# Altium PCB Mic_Amplifier.PcbDoc
Units mm, origin at the board's own origin, x right, y up, seen from the top; angles counter-clockwise.
Board outline 45 x 30 mm, 2 copper layers (Top Layer, Bottom Layer); 43 components, 24 nets, 114 pads, 61 vias.
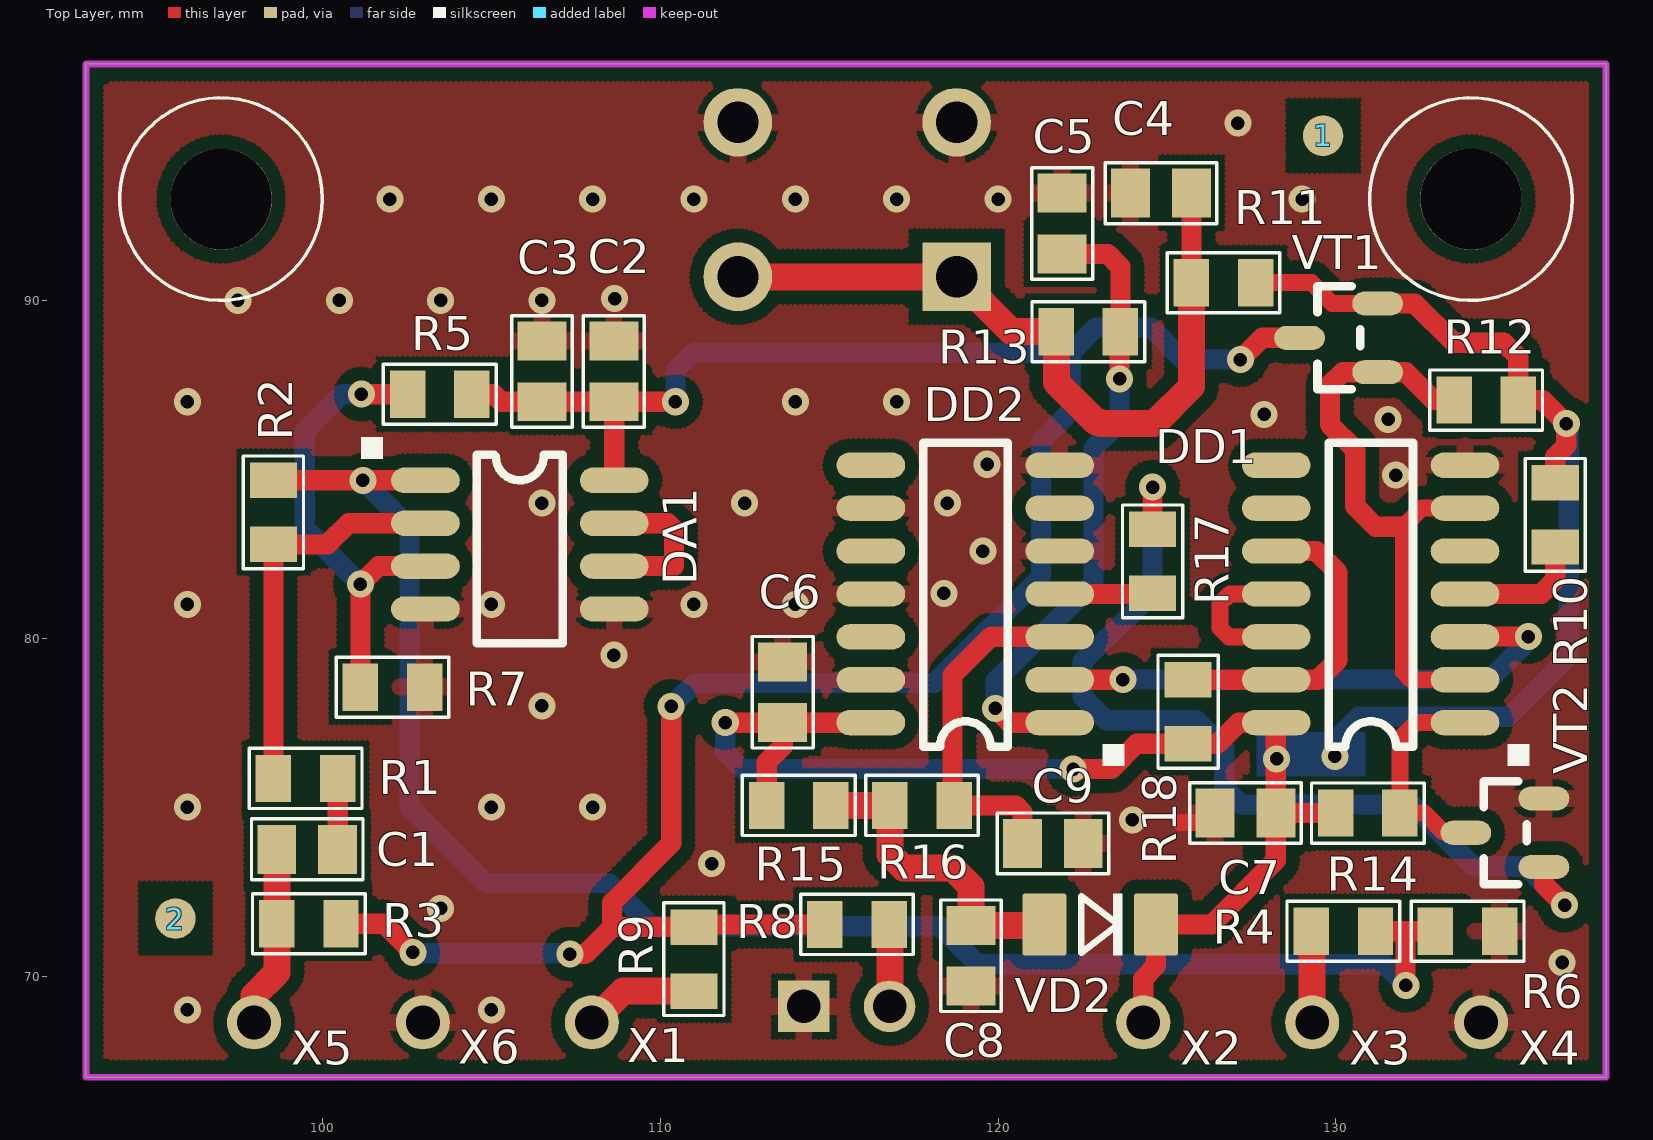
[diagram p0: Top Layer view]
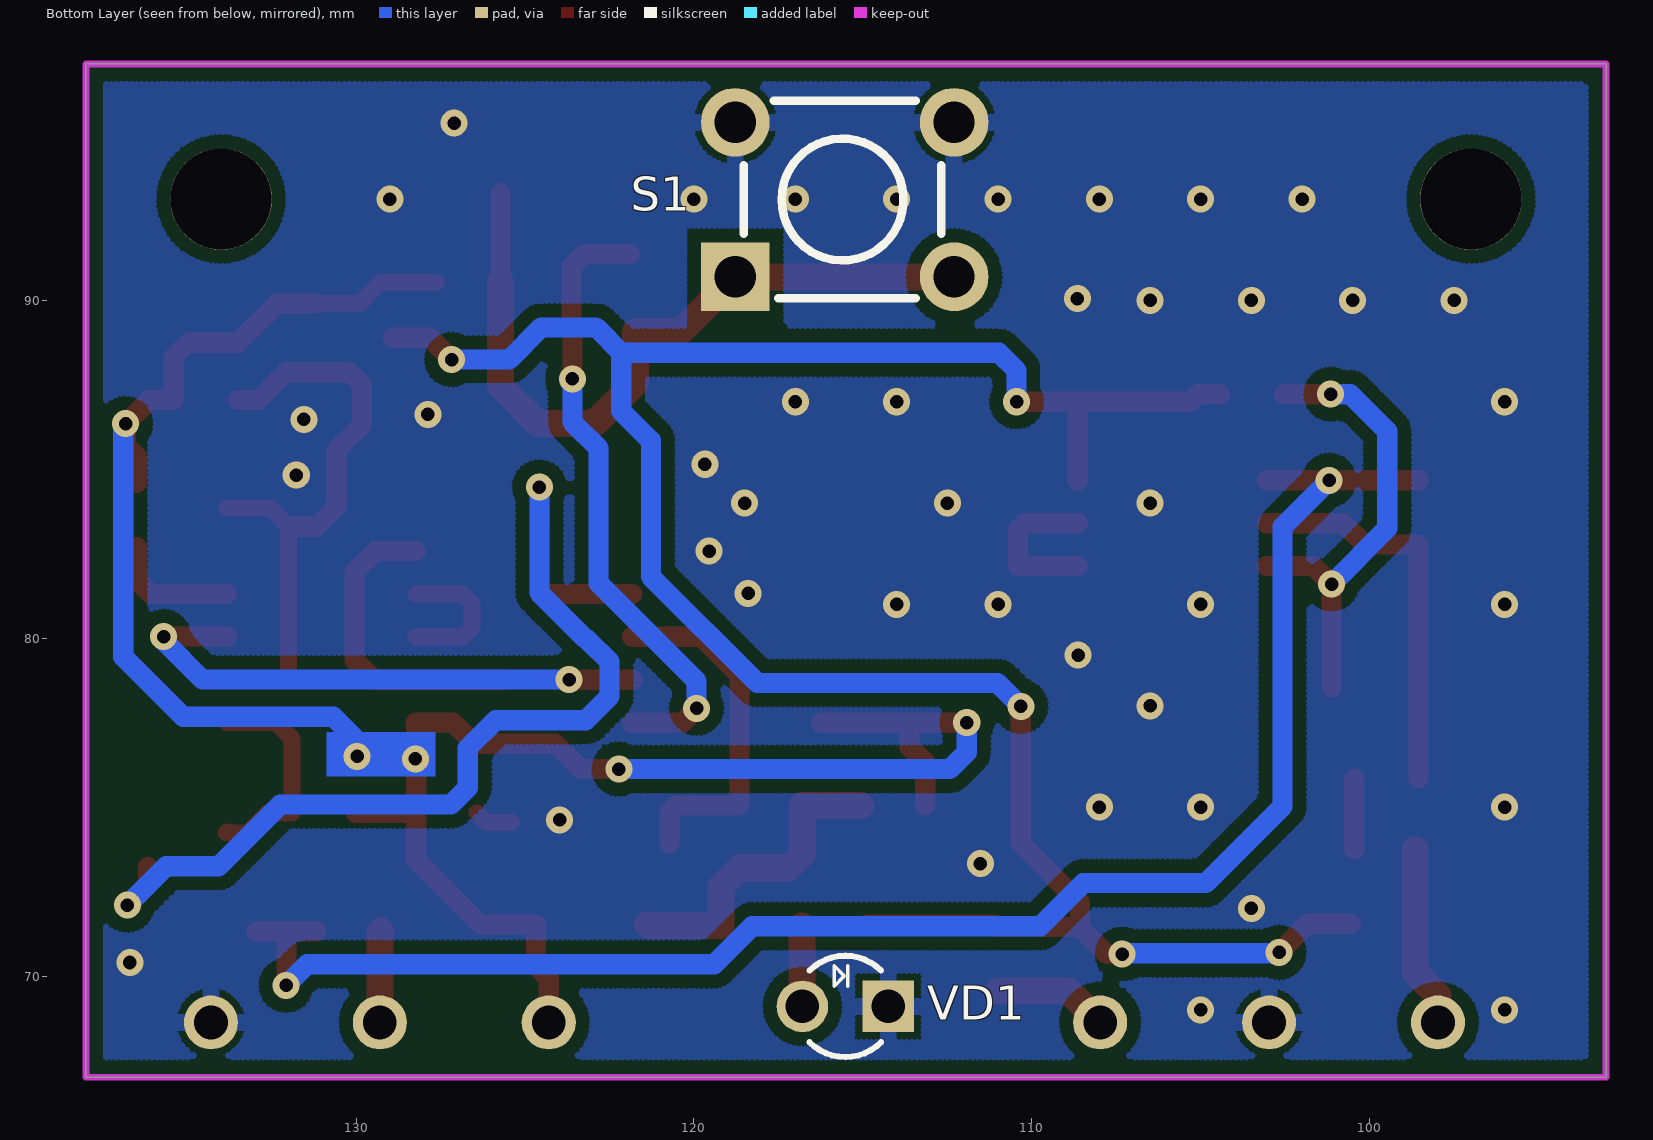
[diagram p1: Bottom Layer view, seen from below]

## Layer stack, top to bottom
Top Solder: solder mask 0.0102, Solder Resist, Dk 3.5
Top Layer: signal copper 0.0356
Dielectric 1: dielectric 0.32, FR-4, Dk 4.8
Bottom Layer: signal copper 0.0356
Bottom Solder: solder mask 0.0102, Solder Resist, Dk 3.5

## Board outline
93,67 138,67 138,97 93,97

## Design rules (kind name [scope] priority, off if disabled: settings)
Clearance [All] p1: gap=0.4
ComponentClearance [All] p1: gap=0.2 collisioncheckmode=3 verticalgap=2540 showdistances=FALSE
PolygonConnect PolygonConnect_1 [IsVia] p1: connectstyle=Direct reliefconductorwidth=0.254 reliefentries=4 polygonreliefangle="90 Angle" airgapwidth=0.254
PolygonConnect [All] p2: connectstyle=Relief reliefconductorwidth=0.5 reliefentries=4 polygonreliefangle="90 Angle" airgapwidth=0.2
RoutingVias [All] p1: holewidth=0.711 width=1.27 viastyle="Through Hole" minholewidth=0.711 minwidth=1.27 maxholewidth=0.711 maxwidth=1.27 useviatemplates=TRUE viatemplateguid#1={59668F55-10FF-42C5-ADF5-3CE09D6D3DFD} viatemplatename#1=v80h40m-20
SilkToSolderMaskClearance [IsPad] p1: minsilkscreentomaskgap=0.2 clearancetoexposedcopper=TRUE
SolderMaskExpansion [All] p1: expansion=0.102
Width [All] p1: maxlimit=3 minlimit=0.2 preferedwidth=0.5
28 further rules are at their usual default settings.

## Classes and differential pairs
component class Main: 1 2 C1 C2 C3 DA1 R1 R2 R3 R4 R5 R6 R7 R8 R9 S1 VD1 X1 X2 X3 X4 X5 X6
component class ON_OFF: C4 C5 C6 C7 C8 C9 DD1 DD2 R10 R11 R12 R13 R14 R15 R16 R17 R18 VD2 VT1 VT2

## Components (designator, comment, footprint, x,y, rotation, side; value= is the part's Value field where it differs from the comment)
1 "REPER1.2" REPER1.2 129.625,94.875 r90 top
2 "REPER1.2" REPER1.2 95.65,71.7 r90 top
C1 "0.1uF" CC0805 99.55,73.75 r0 top
C2 "0.1uF" CC0805 108.625,87.9 r270 top
C3 "10uFx16V" CC0805 106.5,87.9 r270 top
C4 "10uFx16V" CC0805 124.825,93.175 r0 top
C5 "1nF" CC0805 121.9,92.275 r270 top
C6 "0.1uF" CC0805 113.625,78.4 r270 top
C7 "0.1uF" CC0805 127.325,74.825 r0 top
C8 "10uFx16V" CC0805 119.2,70.6 r90 top
C9 "1nF" CC0805 121.625,73.925 r180 top
DA1 "LM358D" SO-8 103.05,84.675 r270 top
DD1 "74HC74D" SO14 133.825,77.5 r90 top
DD2 "SN74HC14D" SO14 121.825,77.5 r90 top
R1 "16k" RC0805 99.5,75.85 r0 top
R2 "1M" RC0805 98.55,83.725 r270 top
R3 "12k" RC0805 99.6,71.55 r0 top
R4 "100E" RC0805 130.225,71.325 r0 top
R5 "12k" RC0805 103.475,87.225 r0 top
R6 "1k2" RC0805 133.9,71.325 r0 top
R7 "12k" RC0805 102.075,78.55 r180 top
R8 "560E" RC0805 115.825,71.525 r180 top
R9 "560E" RC0805 111,70.5 r90 top
R10 "10k" RC0805 136.5,83.65 r90 top
R11 "10k" RC0805 126.675,90.525 r0 top
R12 "10k" RC0805 134.45,87.05 r0 top
R13 "10k" RC0805 122.675,89.075 r0 top
R14 "10k" RC0805 130.95,74.825 r180 top
R15 "220k" RC0805 114.1,75.05 r180 top
R16 "10k" RC0805 117.75,75.05 r0 top
R17 "10k" RC0805 124.575,82.275 r90 top
R18 "10k" RC0805 125.625,77.825 r270 top
S1 "SWT-2/5" 7906H-1 118.777,90.7 r180 bottom
VD1 "LED_3" LED3 114.25,69.1 r0 bottom
VD2 "LL4148" SOD-80 123.025,71.525 r180 top
VT1 "IRLML6302" SOT-23(123) 131.25,87.875 r0 top
VT2 "BC817" SOT-23(123) 136.175,73.225 r0 top
X1 "PIN_1mm" PIN_1mm 107.975,68.625 r0 top
X2 "PIN_1mm" PIN_1mm 124.3,68.625 r0 top
X3 "PIN_1mm" PIN_1mm 129.3,68.625 r0 top
X4 "PIN_1mm" PIN_1mm 134.3,68.625 r0 top
X5 "PIN_1mm" PIN_1mm 97.975,68.625 r0 top
X6 "PIN_1mm" PIN_1mm 102.975,68.625 r0 top

## Footprints (in the part's own frame and the unit in brackets; to place one, negate y for a bottom-side part, rotate by r counter-clockwise, add the part's x,y. Pads: shape width x height; smd on the part's side, far side on the other; paste and mask are expansions set on the pad)
7906H-1 [mil]
  rect 80x80 hole 48: 1(0,0)
  round 80 hole 48: 2(255,0) 3(0,180) 4(255,180)
  silkscreen extent 10,-25 240,205
CC0805 [mm]
  rect 1.15x1.45 smd paste-25.4: 1(-0.9,0) 2(0.9,0)
  silkscreen extent -1.65,-0.9 1.65,0.9
LED3 [mil]
  rect 60x60 hole 39: 1(0,0)
  round 60 hole 39: 2(100,0)
  silkscreen extent 8,-59 92,59
PIN_1mm [mm]
  round 1.6 hole 1: 1(0,0)
RC0805 [mm]
  rect 1.05x1.4 smd paste-25.4: 1(-0.95,0) 2(0.95,0)
  silkscreen extent -1.67,-0.89 1.67,0.89
REPER1.2 [mm]
  round 1.2 smd paste-25.4 mask-25.4: 1(0,0)
  Top Layer pour cut-out: -1.2,-1.2 1.2,-1.2 1.2,1.2 -1.2,1.2
SO14 [mil]
  oval 29.53x80 smd: 1(0,0) 2(50,0) 3(100,0) 4(150,0) 5(200,0) 6(250,0) 7(300,0) 8(300,220) 9(250,220) 10(200,220) 11(150,220) 12(100,220) 13(50,220) 14(0,220)
  silkscreen extent -50,-75 326,159
SO-8 [mil]
  oval 29.53x80 smd: 1(0,0) 2(50,0) 3(100,0) 4(150,0) 5(150,220) 6(100,220) 7(50,220) 8(0,220)
  silkscreen extent -50,-75 190,160
SOD-80 [mm]
  rrect10% 1.3x1.83 smd paste-25.4: 1(1.651,0) 2(-1.651,0)
  silkscreen extent -0.66,-0.91 0.56,0.91
SOT-23(123) [mil]
  oval 59.06x28.07 smd: 1(-0.5,0) 2(-0.5,80) 3(-91.5,40)
  silkscreen extent -70,-20 -20,100

## Part data
C1 C2 C3 C4 C5 C6 C7 C8 C9: library part CC0805, "CC0805"
DD2: "Hex Schmitt-Trigger INVERTERS"
R1 R2 R3 R4 R5 R6 R7 R8 R9 R10 R11 R12 R13 R14 R15 R16 R17 R18: library part RC0805, "RC0805"
S1: "Switch, Single Pole, Single Throw, Normally Open"
VT1: library part IRLML6402, "HEXFET Power MOSFET"
VT2: library part BC846BLT1, "BC846BLT1"

## Free pads (board coordinates)
  round 3 hole 3: 0(97,93) 0(134,93)

## Via types
v1: diameter 0.8, hole 0.4, Top Layer to Bottom Layer, 61 vias

## Nets (pads, with @x,y where several pads share a name; then routed paths per layer and width w, separated by ;. In a path a pad name is that pad's centre, name@x,y a point inside that pad or via, vN(x,y) a via of type N, cw(c..) or ccw(c..) an arc to the next point about the centre after c; other vN are vias at no path point)
GND: C2.1 C3.1 C4.1 C5.1 C6.1 C7.1 C8.1 C9.1 DA1.4 DA1.5 DD1.7 DD2.5 DD2.7 DD2.9 DD2.11 DD2.13 R6.2 R7.1 S1.3 S1.4 VD1.1 VT2.2 X4.1 X6.1 | length 1.1
  Top Layer w0.5: 125.4,74.55 126.15,74.55 C7.1
  other v1: 96,69 105,69 136.7,70.4 103.5,72 111.525,73.325 123.975,74.625 96,75 105,75 108,75 106.5,78 108.625,79.5 96,81 105,81 111,81 114,81 118.4,81.325 119.55,82.575 106.5,84 112.5,84 118.5,84 131.775,84.825 119.675,85.15 131.55,86.475 127.875,86.625 96,87 114,87 117,87 97.5,90 100.5,90 103.5,90 106.5,90 108.65,90.05 102,93 105,93 108,93 111,93 114,93 117,93 120,93 129,93 127.1,95.25
MIC_IN: C1.1 R3.1 X5.1 | length 5.4
  Top Layer w0.8: X5.1 97.975,69.425 98.65,70.1 R3.1 C1.1
NetC1_2: C1.2 R1.2 | length 2.1
  Top Layer w0.6: C1.2 R1.2
NetC4_2: C4.2 R11.1 R13.1 S1.1 S1.2 | length 22.8
  Top Layer w0.6: R11.1 C4.2
  Top Layer w0.8: S1.2 S1.1 120.402,89.075 R13.1 121.725,87.575 122.905,86.395 122.994,86.395 123.039,86.35 124.625,86.35 125.725,87.45 R11.1
  Bottom Layer w0.6: S1.1 S1.1@119.152,90.325
NetC5_2: C5.2 DD2.1 R13.2 | length 18.6
  Top Layer w0.6: v1(119.925,77.925) 120.35,77.5 DD2.1 ; C5.2 123.25,91.375 123.625,91 R13.2 123.6,89.05 v1(123.6,87.675)
  Bottom Layer w0.6: v1(119.925,77.925) 119.925,78.725 122.825,81.625 122.825,85.625 123.6,86.4 v1(123.6,87.675)
NetC8_2: C8.2 R15.1 R16.1 VD2.1 | length 9.3
  Top Layer w0.8: R15.1 R16.1 116.8,73.6 117.2,73.2 118.65,73.2 119.2,72.65 C8.2 121.349,71.5 VD2.1
NetC9_2: C9.2 DD2.3 R16.2 | length 10.6
  Top Layer w0.6: C9.2 120.725,74.85 120.525,75.05 R16.2 118.65,75.1 118.65,78.9 119.79,80.04 DD2.3
NetDA1_1: DA1.1 R2.1 R4.2 R6.1 | length 49.8
  Top Layer w0.6: R2.1 v1(101.2,84.675) DA1.1 ; R4.2 132.062,71.325 ; v1(132.075,69.725) 132.062,69.738 132.062,71.325 ; R6.1 132.062,71.325
  Bottom Layer w0.6: v1(101.2,84.675) 102.575,83.3 102.575,75.025 104.85,72.75 108.475,72.75 109.75,71.475 118.275,71.475 119.4,70.35 131.45,70.35 v1(132.075,69.725)
NetDA1_2: DA1.2 R1.1 R2.2 | length 11.7
  Top Layer w0.6: R1.1 R2.2 100.15,82.775 100.78,83.405 DA1.2
NetDA1_3: DA1.3 R5.1 R7.2 | length 13.9
  Top Layer w0.6: R7.2 v1(101.125,81.6) 101.66,82.135 DA1.3 ; v1(101.15,87.225) R5.1
  Bottom Layer w0.6: v1(101.125,81.6) 99.475,83.25 99.475,86.125 100.575,87.225 v1(101.15,87.225)
NetDA1_6: DA1.6 DA1.7 | length 4.7
  Top Layer w0.6: DA1.6 110.41,82.135 110.41,83.215 110.22,83.405 DA1.7
NetDD1_1: DD1.1 R14.1 VT2.3 | length 6.6
  Top Layer w0.5: VT2.3@133.825,74.267 VT2.3 133.209,74.241 132.625,74.825 R14.1 131.9,77.025 132.375,77.5 DD1.1
NetDD1_2: DD1.2 DD1.6 R12.1 VT1.1 | length 18
  Top Layer w0.5: DD1.2 132.23,78.77 132,79 132,83.3 132.55,83.85 DD1.6
  Top Layer w0.6: 132,83.3 131.175,83.3 130.575,83.9 130.575,85.575 129.825,86.325 129.825,87.5 130.2,87.875 VT1.1 132.075,87.875 132.9,87.05 R12.1
NetDD1_3: DD1.3 DD2.2 | length 16.4
  Top Layer w0.6: DD2.2 123.695,78.77 v1(123.7,78.775) ; DD1.3 133.835,80.05 v1(135.7,80.05)
  Bottom Layer w0.6: v1(123.7,78.775) 134.55,78.775 135.7,79.925 v1(135.7,80.05)
NetDD1_4: DD1.4 R10.1 | length 3.8
  Top Layer w0.6: DD1.4 136.085,81.31 136.5,81.725 R10.1
NetDD1_10: DD1.10 DD1.13 R18.1 | length 9.3
  Top Layer w0.6: R18.1 125.63,78.77 DD1.13 129.47,78.77 130.053,79.353 130.053,81.947 129.42,82.58 DD1.10
NetDD1_11: DD1.11 DD1.12 | length 4.3
  Top Layer w0.5: DD1.12 126.835,80.04 126.575,80.3 126.575,81.025 126.86,81.31 DD1.11
NetDD2_4: DD2.4 R17.1 | length 2.8
  Top Layer w0.6: DD2.4 124.56,81.31 R17.1
NetR8_1: R8.1 VD1.2 | length 2.4
  Top Layer w0.8: VD1.2 116.8,69.11 R8.1@116.8,71.475
NetR9_1: R9.1 X1.1 | length 3.4
  Top Layer w0.8: X1.1 108.9,69.55 R9.1
NetR17_2: R17.2 VT2.1 | length 27.2
  Top Layer w0.6: R17.2 v1(124.575,84.475) ; VT2.1 136.162,72.713 v1(136.775,72.1)
  Bottom Layer w0.6: v1(124.575,84.475) 124.575,81.35 123.2,79.975 123.175,79.975 122.5,79.3 122.5,78.278 123.203,77.575 125.875,77.575 126.7,76.75 126.7,75.575 127.2,75.075 132.25,75.075 134.075,73.25 135.625,73.25 v1(136.775,72.1)
OUT: R4.1 X3.1 | length 2.7
  Top Layer w0.8: R4.1 129.3,71.3 X3.1
VCC: C2.2 C3.2 DA1.8 R3.2 R5.2 R8.2 R9.2 VT1.3 | length 70.9
  Top Layer w0.6: R3.2 101.825,71.55 v1(102.675,70.7) ; R5.2 105.075,87.225 105.3,87 C3.2 C2.2 ; v1(107.325,70.65) 107.775,70.65 108.575,71.45 ; DA1.8 108.638,86.987 C2.2 ; v1(110.325,77.981) 110.325,73.925 108.575,72.175 108.575,71.45 ; v1(110.45,87) C2.2 ; R8.2 111.075,71.525 R9.2 108.575,71.45 ; v1(127.175,88.25) 127.816,88.891 VT1.3
  Bottom Layer w0.6: v1@102.65,70.675 107.3,70.675 v1(107.325,70.65) ; v1(110.325,77.981) 111.019,78.675 118.125,78.675 121.275,81.825 121.275,85.85 122.15,86.725 122.15,88.45 ; v1(110.45,87) 110.45,87.925 110.975,88.45 122.15,88.45 ; v1(127.175,88.25) 125.475,88.25 124.525,89.2 122.9,89.2 122.15,88.45
VIN: C6.2 C7.2 DD1.14 DD2.14 R10.2 R11.2 R12.2 R14.2 R15.2 R18.2 VD2.2 VT1.2 X2.1 | length 66.4
  Top Layer w0.5: R11.2 129.275,90.525 129.893,89.907 VT1.2
  Top Layer w0.6: v1(111.925,77.5) C6.2 ; R15.2 113.15,76.325 113.625,76.8 C6.2 ; DD2.14 C6.2 ; v1(122.225,76.125) 123.35,76.125 124.1,76.875 R18.2 126.5,76.875 127.125,77.5 DD1.14 128.225,77.488 C7.2 ; X2.1 124.3,69.925 124.676,70.301 VD2.2 126.325,71.525 128.225,73.425 C7.2 ; R14.2 C7.2 ; VT1.2 132.343,89.907 133.5,88.75 134.975,88.75 135.4,88.325 R12.2 136.125,87.05 v1(136.825,86.35) 136.825,85.7 136.5,85.375 R10.2
  Bottom Layer w0.6: v1(111.925,77.5) 111.925,76.625 112.425,76.125 v1(122.225,76.125) ; 130.1,77.1 130.675,77.675 135.125,77.675 136.9,79.45 136.9,86.275 v1(136.825,86.35)
  other v1: 128.25,76.425 129.975,76.5
pads on no net: 1.1 2.1 DD1.5 DD1.8 DD1.9 DD2.6 DD2.8 DD2.10 DD2.12

## Polygon pours and split planes (outlines as drawn)
GND on Top Layer "GND_L01_P030" (hatched 90Degree grid 0.15 track 0.2, remove dead copper, pour order 30): 93,97 138,97 138,67 93,67
GND on Bottom Layer "GND_L02_P028" (hatched 90Degree grid 0.15 track 0.2, remove dead copper, pour order 28): 93,97 138,97 138,67 93,67

## Keep-outs
Keep-Out Layer:
  the board outline again, w0.2

## Other copper
Bottom Layer:
  rectangle net VIN: 127.65,75.9 130.875,77.225

## Silkscreen, mask and mechanical layers (free items; w line width, h text height)
Top Overlay:
  circle w0.1: c97,93 r3
  circle w0.1: c134,93 r3

## Dimensions
138,97 to 138,67 on Mechanical 1
93,97 to 138,97 on Mechanical 1